# Altium PCB mchf_pro_mix.PcbDoc (part 1 of 2)
Units mil, origin at the board's own origin, x right, y up, seen from the top; angles counter-clockwise.
Board outline 3100.2 x 3132.7 mil, 2 copper layers (Top Layer, Bottom Layer); 178 components, 123 nets, 498 pads, 246 vias.
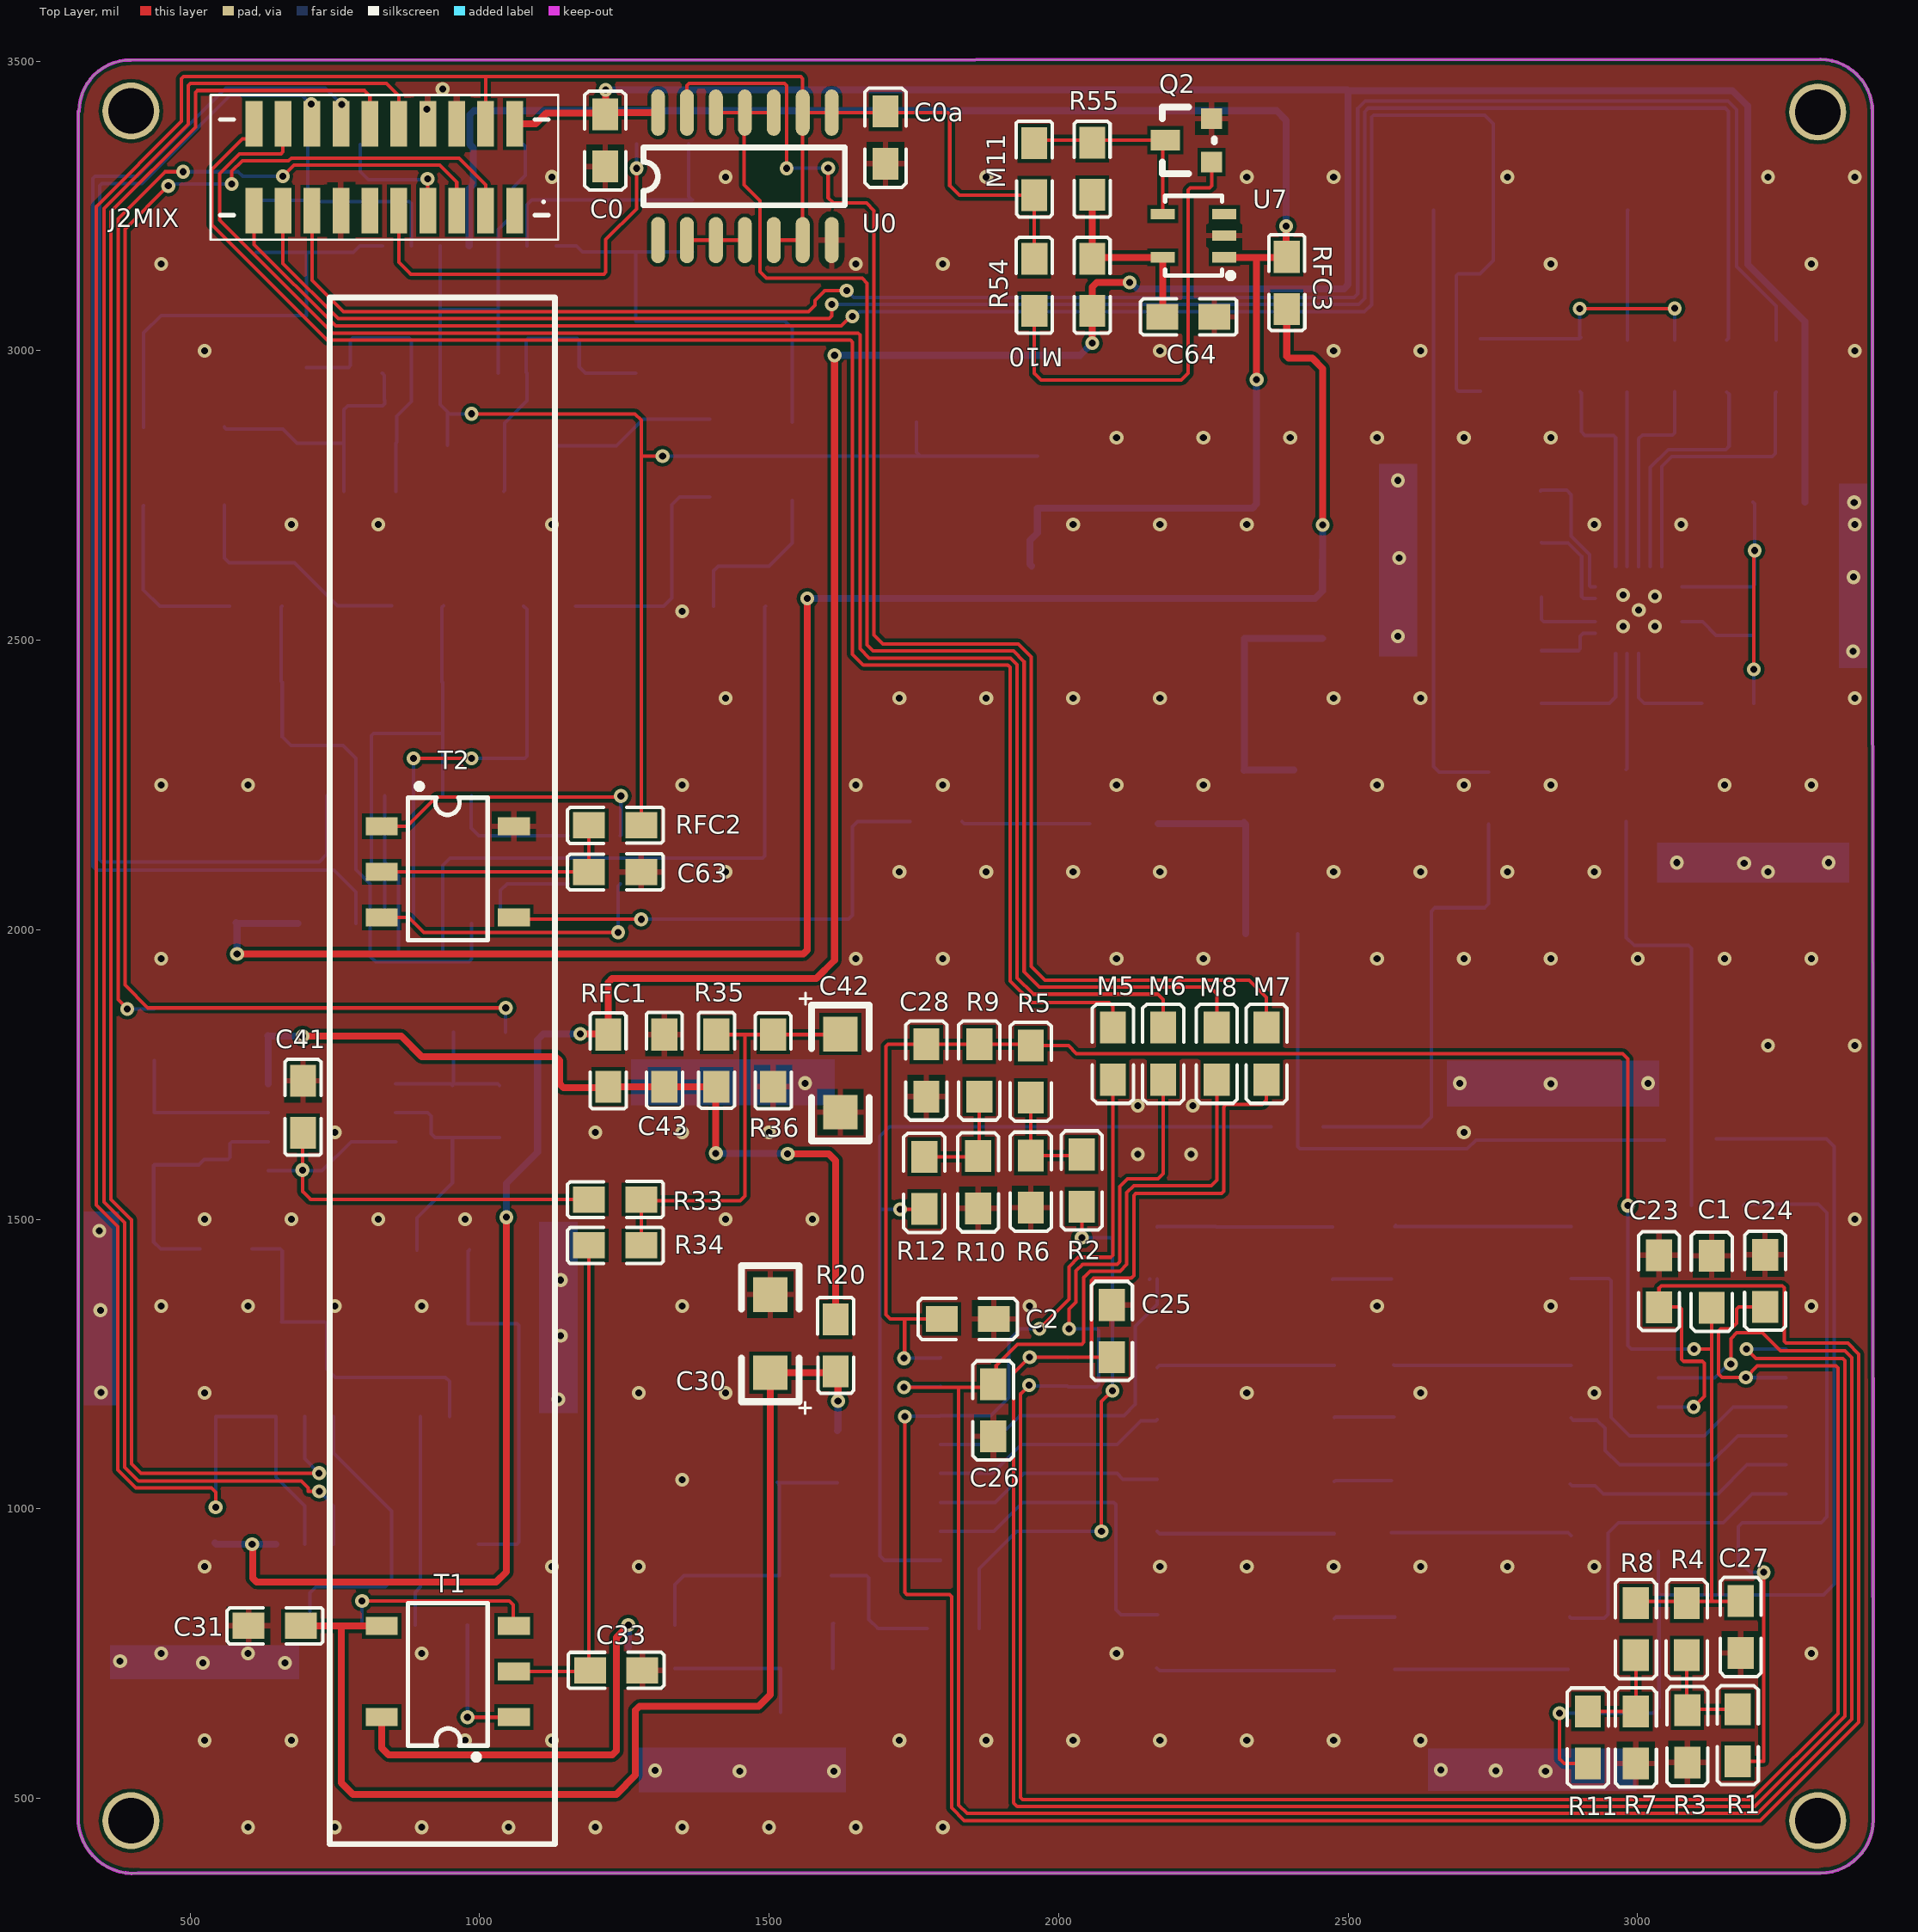
[diagram p0: Top Layer view]
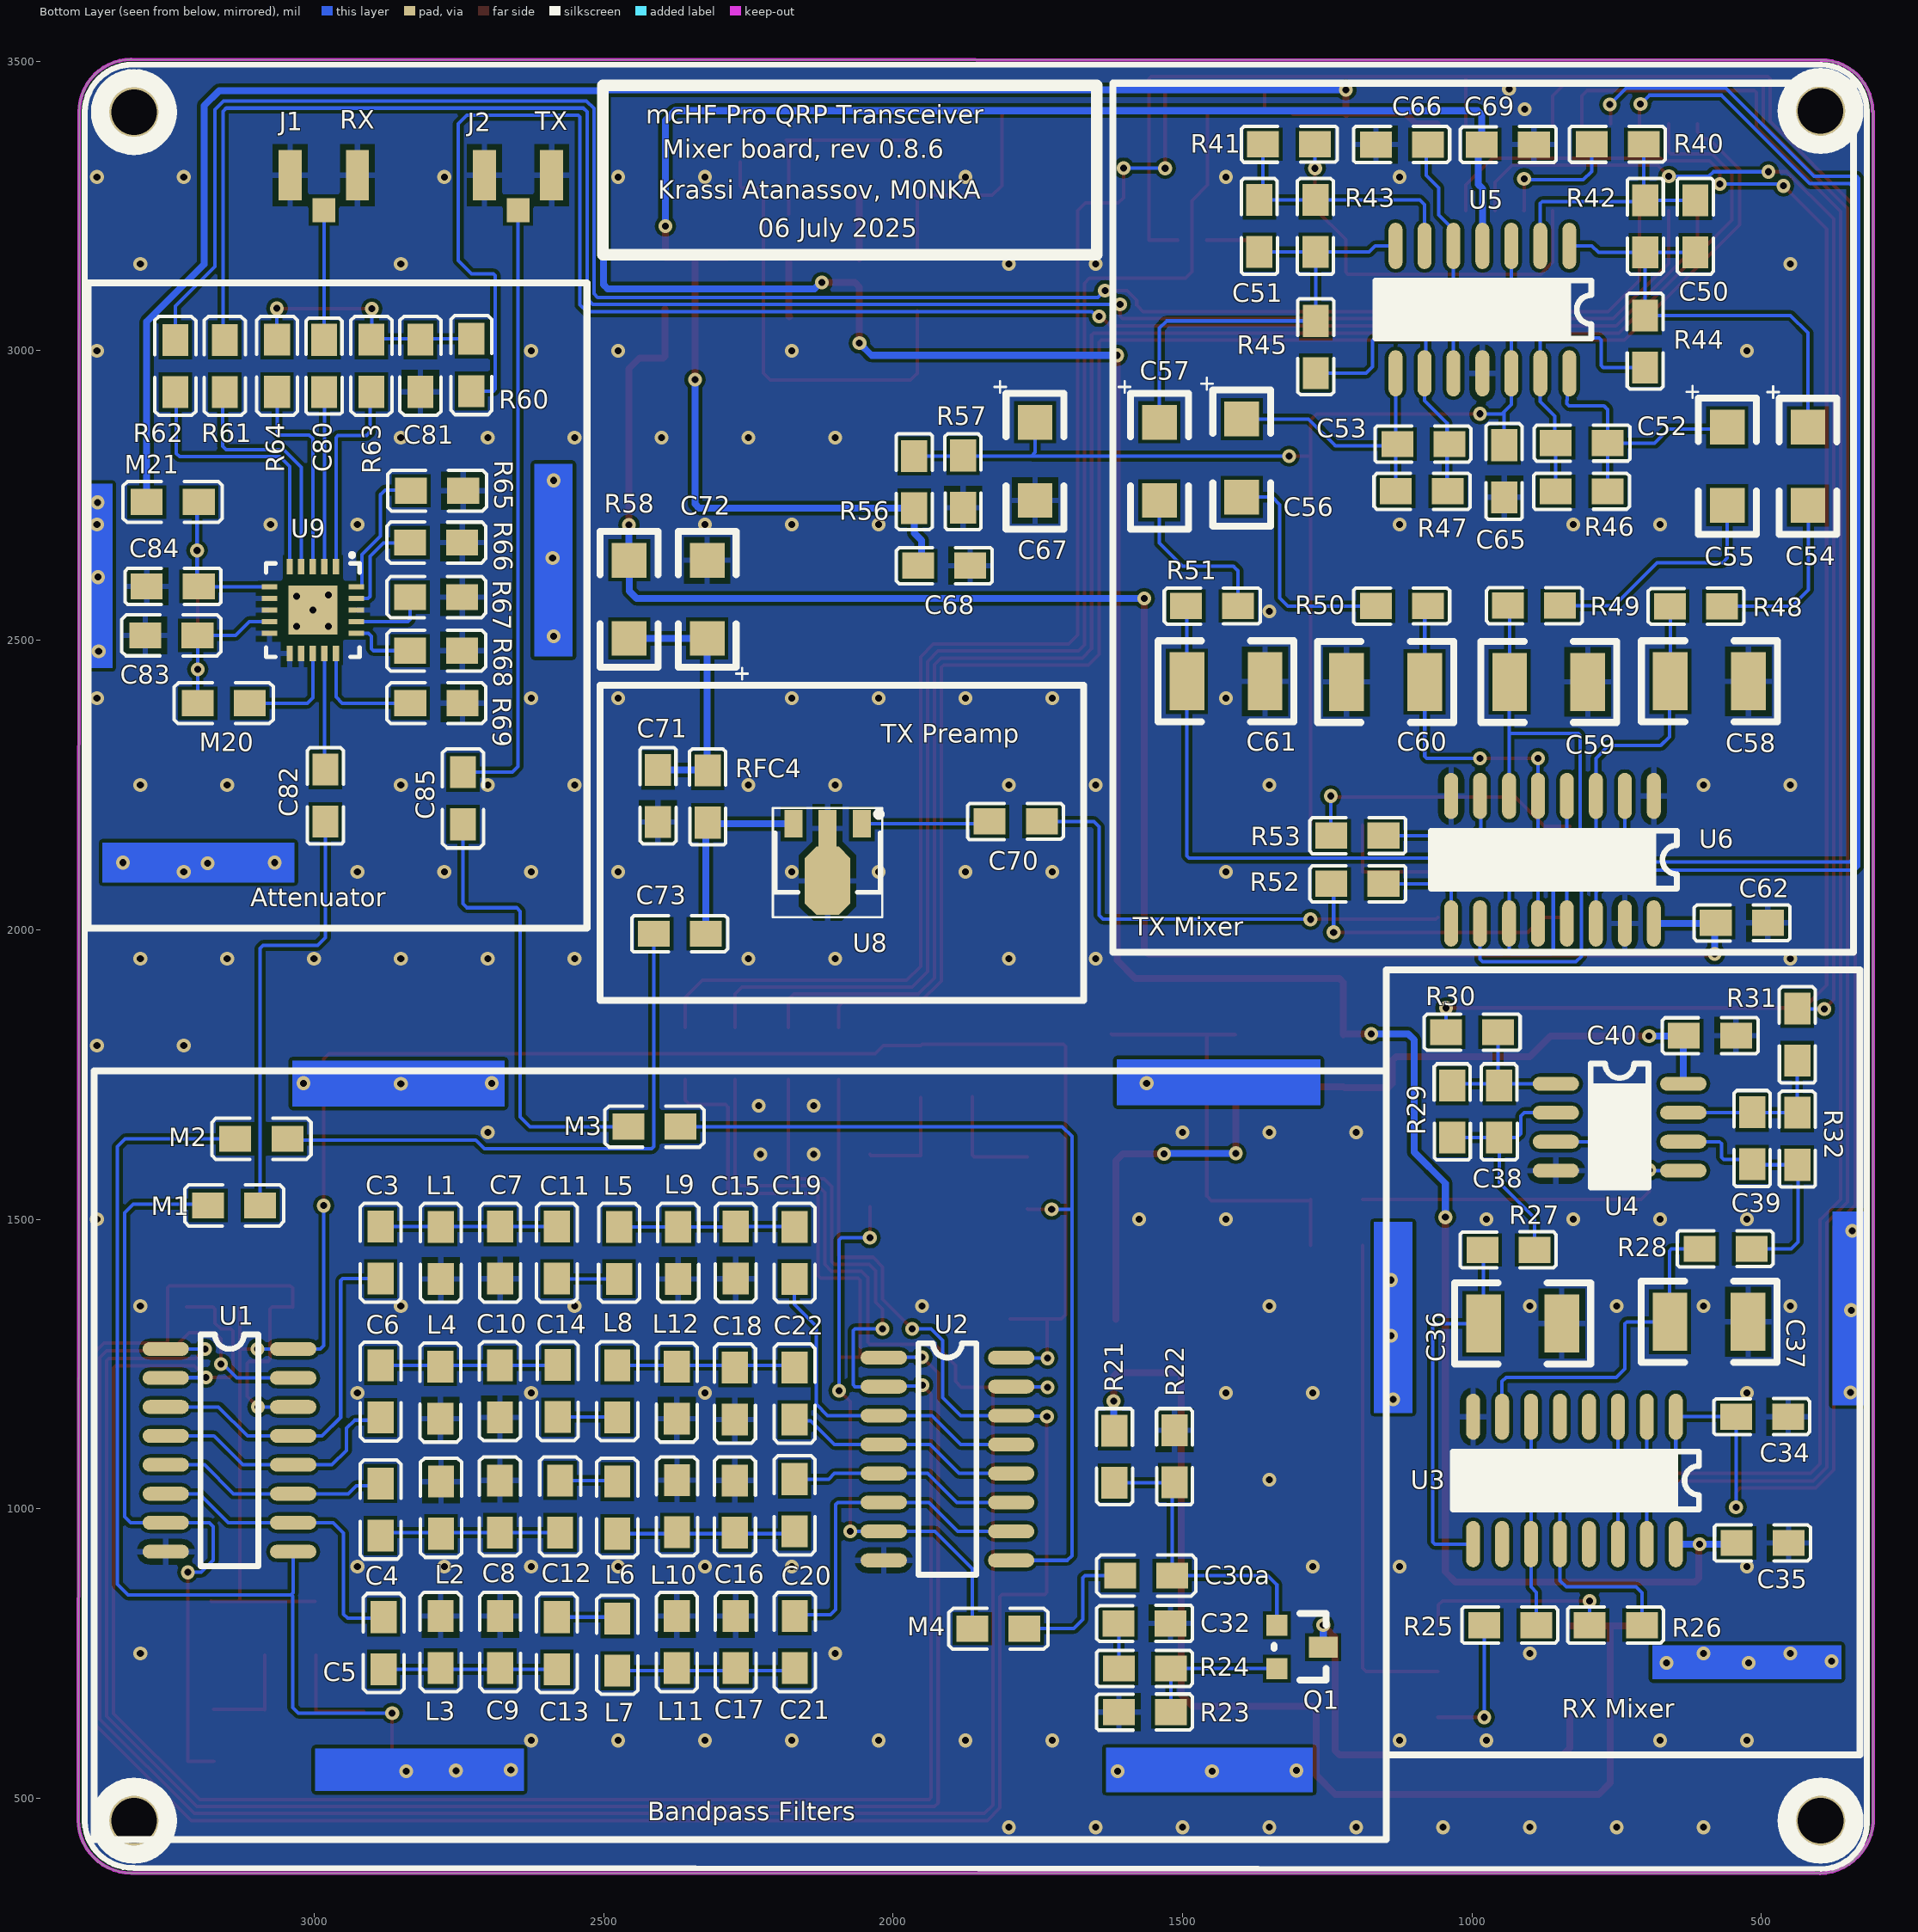
[diagram p1: Bottom Layer view, seen from below]

## Layer stack, top to bottom
Top Solder: solder mask 0.4, Solder Resist, Dk 3.5
Top Layer: signal copper 1.4
Dielectric1: core 12.6, FR-4, Dk 4.8
Bottom Layer: signal copper 1.4
Bottom Solder: solder mask 0.4, Solder Resist, Dk 3.5

## Board outline
306.88,457.96 ccw(c401.92,465.6) 409.56,370.56 3315.1,370.56 3315.55,371 3316,371 ccw(c3315.55,462.53) 3407.08,462.99 3407.05,468.78 3406.99,468.84 3406.73,1225.13 3406.48,1225.38 3405.99,2661.63 3405.74,3412 ccw(c3315.36,3412.62) 3315.98,3503 396.95,3502 397.47,3502 ccw(c396.98,3413.03) 308.01,3413.52 306.88,3413.48

## Design rules (kind name [scope] priority, off if disabled: settings)
Clearance [All] p1: gap=6 ignorepadtopadclearanceinfootprint=FALSE except(0: Arc-Hole Track-Hole SMDPad-Hole THPad-Hole Via-Hole Fill-Hole Poly-Hole Region-Hole Text-Hole)
ComponentClearance [All] p1: gap=6 collisioncheckmode=3 verticalgap=10 showdistances=FALSE
DiffPairsRouting [All] p1: maxlimit=24 minlimit=6 mostfreqgap=6 toplayer_minwidth=6 toplayer_maxwidth=6 toplayer_prefwidth=6 bottomlayer_minwidth=6 bottomlayer_maxwidth=6 bottomlayer_prefwidth=6 maxuncoupledlength=500
HoleSize [All] p1: absolutevalues=TRUE maxlimit=6000 minlimit=11.81 maxpercent=80.000 minpercent=20.000
HoleToHoleClearance [All] p1: gap=6 allowstackedmicrovias=TRUE
MinimumSolderMaskSliver MinimumSolderMaskSliver_CN1 [InComponent('CN1')] p1: minsoldermaskwidth=6
MinimumSolderMaskSliver [All] p2: minsoldermaskwidth=6
PolygonConnect PolygonConnect_2 [InComponent('J211')] p1: connectstyle=Direct reliefconductorwidth=100 reliefentries=4 polygonreliefangle="90 Angle" airgapwidth=10
PolygonConnect PolygonConnect_1 [IsVia] p2: connectstyle=Direct reliefconductorwidth=10 reliefentries=4 polygonreliefangle="90 Angle" airgapwidth=10
PolygonConnect [All] p3: connectstyle=Relief reliefconductorwidth=10 reliefentries=4 polygonreliefangle="90 Angle" airgapwidth=10
RoomDefinition "TX Mixer" [InComponentClass('TX Mixer')] p1: confinementstyle=ConfineIn formatcopy=TRUE lockcomponents=FALSE outline 315,1940 2540,1940 2540,3496 315,3496
RoomDefinition Attenuator [InComponentClass('Attenuator')] p2: confinementstyle=ConfineIn formatcopy=TRUE lockcomponents=FALSE outline 2547,1939 3402,1939 3402,3500 2547,3500
RoomDefinition "Bandpass filters" [InComponentClass('Bandpass filters')] p3: confinementstyle=ConfineIn formatcopy=TRUE lockcomponents=FALSE outline 3405,1929 1695,1929 1695,376 3405,376
RoomDefinition "RX Detector" [InComponentClass('RX Detector')] p4: confinementstyle=ConfineIn formatcopy=TRUE lockcomponents=FALSE outline 1683,1928 312,1928 312,375.78 1683,375.78
RoomDefinition "UI board Interface" [InComponentClass('UI board Interface')] p5: confinementstyle=ConfineIn formatcopy=TRUE lockcomponents=FALSE outline 312,3111 3401,3111 3401,3501 312,3501
RoutingVias [All] p1: holewidth=15 width=30 viastyle="Through Hole" minholewidth=28 minwidth=50 maxholewidth=28 maxwidth=50
SilkToSilkClearance [All] p1: silktosilkclearance=5
SilkToSolderMaskClearance SilkscreenOverComponentPads [IsPad] p1: minsilkscreentomaskgap=0 clearancetoexposedcopper=TRUE
SolderMaskExpansion SolderMaskExpansion_1 [IsVia] p1: expansion=-15 istentingtop=FALSE
SolderMaskExpansion [All] p2: expansion=6 istentingtop=FALSE
Width "Schematic Width Constraint" [InNet('VCC_5V_RF')] p1: maxlimit=12 minlimit=12 preferedwidth=12
Width "Schematic Width Constraint_16" [InNet('NetC73_2')] p2: maxlimit=12 minlimit=12 preferedwidth=12
Width "Schematic Width Constraint_15" [InNet('NetC71_1')] p3: maxlimit=12 minlimit=12 preferedwidth=12
Width "Schematic Width Constraint_14" [InNet('SC_A5V')] p4: maxlimit=12 minlimit=12 preferedwidth=12
Width "Schematic Width Constraint_13" [InNet('NetC64_2')] p5: maxlimit=12 minlimit=12 preferedwidth=12
Width "Schematic Width Constraint_12" [InNet('NetC30_1')] p6: maxlimit=12 minlimit=12 preferedwidth=12
Width "Schematic Width Constraint_11" [InNet('NetQ1_3')] p7: maxlimit=12 minlimit=12 preferedwidth=12
Width "Schematic Width Constraint_10" [InNet('RXD_A5V')] p8: maxlimit=12 minlimit=12 preferedwidth=12
Width "Schematic Width Constraint_6" [InNet('VCC_5V_TX')] p9: maxlimit=12 minlimit=12 preferedwidth=12
Width Width_BLGND [InNet('BLGND')] p10: maxlimit=12 minlimit=12 preferedwidth=12
Width Width_BLVDD [InNet('BLVDD')] p11: maxlimit=12 minlimit=12 preferedwidth=12
Width Width_VDD [InNet('VDD')] p12: maxlimit=12 minlimit=12 preferedwidth=12
Width Width_LCD_BL_A [InNet('LCD_BL_A')] p13: maxlimit=12 minlimit=12 preferedwidth=12
Width Width_LCD_BL_K [InNet('LCD_BL_K')] p14: maxlimit=12 minlimit=12 preferedwidth=12
Width Width_D1_1 [InNet('NetD1_1')] p15: maxlimit=12 minlimit=12 preferedwidth=12
Width [All] p16: maxlimit=6 minlimit=6 preferedwidth=6
23 further rules are at their usual default settings.

## Classes and differential pairs
component class Attenuator: C80 C81 C82 C83 C84 C85 J1 J2 M20 M21 R60 R61 R62 R63 R64 R65 R66 R67 R68 R69 U9
component class "Bandpass filters": C1 C2 C3 C4 C5 C6 C7 C8 C9 C10 C11 C12 C13 C14 C15 C16 C17 C18 C19 C20 C21 C22 C23 C24 C25 C26 C27 C28 L1 L2 L3 L4 L5 L6 L7 L8 L9 L10 L11 L12 M1 M2 M3 M4 M5 M6 M7 M8 R1 R2 R3 R4 R5 R6 R7 R8 R9 R10 R11 R12 U1 U2
component class "UI board Interface": C0 C0a J2MIX U0
component class "TX Mixer": C50 C51 C52 C53 C54 C55 C56 C57 C58 C59 C60 C61 C62 C63 C64 C65 C66 C67 C68 C69 C70 C71 C72 C73 M10 M11 Q2 R40 R41 R42 R43 R44 R45 R46 R47 R48 R49 R50 R51 R52 R53 R54 R55 R56 R57 R58 RFC2 RFC3 RFC4 T2 U5 U6 U7 U8
component class "RX Detector": C30 C30a C31 C32 C33 C34 C35 C36 C37 C38 C39 C40 C41 C42 C43 Q1 R20 R21 R22 R23 R24 R25 R26 R27 R28 R29 R30 R31 R32 R33 R34 R35 R36 RFC1 T1 U3 U4

## Components (designator, comment, footprint, x,y, rotation, side; value= is the part's Value field where it differs from the comment)
C0 "100nF" 0805 1216.78,3408.86 r270 top
C0a "100nF" 0805 1700.78,3413.86 r270 top
C1 "100nF" 0805 3128.22,1346.14 r90 top
C2 "100nF" 0805 1797.14,1327.78 r0 top
C3 "100nF" 0805 2885.22,1488.18 r270 bottom
C4 "100nF" 0805 2884.86,952.82 r90 bottom
C5 "100nF" 0805 2879.53,722.14 r90 bottom
C6 "100nF" 0805 2885.22,1248.39 r270 bottom
C7 "1.5nF" 0805 2678.78,1488.18 r270 bottom
C8 "820pF" 0805 2678.78,958.14 r90 bottom
C9 "390pF" 0805 2678.78,815.86 r270 bottom
C10 "180pF" 0805 2678.78,1157.14 r90 bottom
C11 "680pF" 0805 2580.78,1488.18 r270 bottom
C12 "390pF" 0805 2574.67,958.14 r90 bottom
C13 "180pF" 0805 2580.42,722.14 r90 bottom
C14 "82pF" 0805 2579.14,1249.18 r270 bottom
C15 "1.5nF" 0805 2271.78,1488.18 r270 bottom
C16 "820pF" 0805 2272.86,958.14 r90 bottom
C17 "390pF" 0805 2271.78,815.86 r270 bottom
C18 "180pF" 0805 2272.86,1153.14 r90 bottom
C19 "100nF" 0805 2169.86,1396.14 r90 bottom
C20 "100nF" 0805 2170.22,1052.18 r270 bottom
C21 "100nF" 0805 2169.86,815.86 r270 bottom
C22 "100nF" 0805 2169.86,1153.14 r90 bottom
C23 "100nF" 0805 3037.22,1347.14 r90 top
C24 "100nF" 0805 3220.39,1347.86 r90 top
C25 "100nF" 0805 2092.22,1261.14 r90 top
C26 "100nF" 0805 1886.78,1215.86 r270 top
C27 "100nF" 0805 3177.78,841.86 r270 top
C28 "100nF" 0805 1771.35,1802.86 r270 top
C30 "10uF" 1206_Elec_Cap 1502.22,1234.14 r90 top
C30a "100nF" 0805 1608.63,884.51 r180 bottom
C31 "100nF" 0805 691.86,798.22 r180 top
C32 "100nF" 0805 1519.91,802.28 r0 bottom
C33 "100nF" 0805 1190.14,720.78 r0 top
C34 "100nF" 0805 544.86,1158.78 r180 bottom
C35 "100nF" 0805 543.86,940.78 r180 bottom
C36 "22nF" CAP_B 980.39,1320.12 r180 bottom
C37 "22nF" CAP_B 658.39,1323.12 r180 bottom
C38 "390" 0805 952.78,1640.14 r90 bottom
C39 "390" 0805 515.78,1594.14 r90 bottom
C40 "100nF" 0805 543.14,1817.22 r0 bottom
C41 "100nF" 0805 695.22,1648.14 r90 top
C42 "10uF" 1206_Elec_Cap 1622.78,1820.86 r270 top
C43 "100nF" 0805 1318.78,1819.86 r270 top
C50 "100pF" 0805 614.52,3260.41 r270 bottom
C51 "100pF" 0805 1367.01,3169.45 r90 bottom
C52 "100pF" 0805 764.59,2840.71 r0 bottom
C53 "100pF" 0805 1129.93,2838.41 r180 bottom
C54 "10uF" 1206_Elec_Cap 419.93,2868.58 r270 bottom
C55 "10uF" 1206_Elec_Cap 559.22,2868.86 r270 bottom
C56 "10uF" 1206_Elec_Cap 1397.8,2882.95 r270 bottom
C57 "10uF" 1206_Elec_Cap 1539.99,2877.32 r270 bottom
C58 "22nF" CAP_B 657.78,2429.12 r180 bottom
C59 "22nF" CAP_B 935.39,2428.12 r180 bottom
C60 "22nF" CAP_B 1081.23,2427.88 r0 bottom
C61 "22nF" CAP_B 1492.78,2429.12 r180 bottom
C62 "100nF" 0805 488.14,2012.22 r0 bottom
C63 "100nF" 0805 1279.86,2100 r180 top
C64 "2.2uF" 0805 2269.8,3058.73 r180 top value=1礔
C65 "100nF" 0805 944.19,2746.01 r90 bottom
C66 "100nF" 0805 1166.86,3355.78 r180 bottom
C67 "10uF" 1206_Elec_Cap 1754.9,2877.32 r270 bottom
C68 "100nF" 0805 1866,2629 r0 bottom
C69 "100nF" 0805 892.14,3356.22 r0 bottom
C70 "100nF" 0805 1833.86,2186.78 r180 bottom
C71 "100nF" 0805 2406.22,2276.86 r270 bottom
C72 "10uF" 1206_Elec_Cap 2320.78,2502.28 r90 bottom
C73 "100nF" 0805 2413.86,1992.78 r180 bottom
C80 "100nF" 0805 2982.43,2927.88 r90 bottom
C81 "100pF" 0805 2816.41,3019.76 r270 bottom
C82 "100nF" 0805 2980.08,2185.9 r90 bottom
C83 "100pF" 0805 3200.38,2508.65 r0 bottom
C84 "100nF" 0805 3198.14,2593.22 r0 bottom
C85 "100nF" 0805 2742.86,2272.86 r270 bottom
J1 "RX" UFL 3041.14,3303 r180 bottom locked
J2 "TX" UFL 2705.66,3303 r180 bottom locked
J2MIX "1373866" YUANQI4MM 835.43,3316.54 r180 top locked
L1 "2.2uH" 0805 2780.78,1396.14 r90 bottom
L2 "1uH" 0805 2780.78,1047.86 r270 bottom
L3 "0.47uH" 0805 2781.58,815.86 r270 bottom
L4 "0.33uH" 0805 2781.58,1154.78 r90 bottom
L5 "4.7uH" 0805 2472.86,1396.14 r90 bottom
L6 "2.2uH" 0805 2476.39,1047.86 r270 bottom
L7 "1uH" 0805 2476.39,811.15 r270 bottom
L8 "0.68uH" 0805 2476.03,1157.14 r90 bottom
L9 "2.2uH" 0805 2370.86,1396.14 r90 bottom
L10 "1uH" 0805 2373.16,1050.18 r270 bottom
L11 "0.47uH" 0805 2373.52,815.86 r270 bottom
L12 "0.33uH" 0805 2373.16,1154.78 r90 bottom
M1 "0" 0805 3183.86,1523.78 r180 bottom
M2 "0" 0805 3136.86,1638.78 r180 bottom
M3 "0" 0805 2457.86,1659.78 r180 bottom
M4 "0" 0805 1772.14,793.22 r0 bottom
M5 "0" 0805 2093.6,1831.86 r270 top
M6 "0" 0805 2180.51,1831.86 r270 top
M7 "0" 0805 2358.84,1831.86 r270 top
M8 "0" 0805 2272.86,1831.86 r270 top
M10 "0" 0805 2058.22,3067.76 r90 top
M11 "0" 0805 1957.78,3359.1 r270 top
M20 "0" 0805 3110.09,2391.49 r0 bottom
M21 "0" 0805 3198.14,2738.91 r0 bottom
Q1 "BFR93A" SOT-23 1337.34,799.39 r270 bottom
Q2 "(DNI)IRLML6244TRPBF" SOT-23 2264.52,3325.2 r90 top
R1 "100K" 0805 3173.22,563.14 r90 top
R2 "100K" 0805 2040,1521 r90 top
R3 "4.7K" 0805 3086.22,561.14 r90 top
R4 "4.7K" 0805 3085.22,746.14 r90 top
R5 "4.7K" 0805 1951.78,1800.86 r270 top
R6 "4.7K" 0805 1951.78,1610.86 r270 top
R7 "4.7K" 0805 2997.22,559.14 r90 top
R8 "4.7K" 0805 2997.22,746.14 r90 top
R9 "4.7K" 0805 1862.78,1802.86 r270 top
R10 "4.7K" 0805 1860.78,1609.86 r270 top
R11 "100K" 0805 2913.78,650.86 r270 top
R12 "100K" 0805 1767.78,1608.86 r270 top
R20 "100" 0805 1614.78,1327.86 r270 top
R21 "4.7K" 0805 1617.78,1135.71 r270 bottom
R22 "1.5K" 0805 1513.41,1044.75 r90 bottom
R23 "10" 0805 1610.87,648.61 r180 bottom
R24 "10" 0805 1610.87,724.08 r180 bottom
R25 "100" 0805 979.86,798.78 r180 bottom
R26 "100" 0805 797.45,798.78 r180 bottom
R27 "100" 0805 982.86,1446.78 r180 bottom
R28 "100" 0805 607.86,1448.78 r180 bottom
R29 "2.2k" 0805 1033.78,1640.14 r90 bottom
R30 "100" 0805 954.14,1823.22 r0 bottom
R31 "100" 0805 437.78,1773.15 r90 bottom
R32 "2.2k" 0805 437.78,1593.14 r90 bottom
R33 "100" 0805 1279.86,1534.22 r180 top
R34 "100" 0805 1279.86,1455.22 r180 top
R35 "1K" 0805 1408.78,1819.86 r270 top
R36 "1K" 0805 1507.22,1728.14 r90 top
R40 "10k" 0805 794.26,3356.22 r180 bottom
R41 "10k" 0805 1270.14,3356.81 r0 bottom
R42 "10k" 0805 700.89,3260.41 r270 bottom
R43 "10k" 0805 1270.14,3169.45 r90 bottom
R44 "10k" 0805 701.22,3061.86 r270 bottom
R45 "10k" 0805 1270.14,3052.23 r270 bottom
R46 "10k" 0805 856.3,2756.89 r180 bottom
R47 "10k" 0805 1040.85,2757.41 r0 bottom
R48 "47" 0805 567.43,2558.78 r0 bottom
R49 "47" 0805 847,2560 r0 bottom
R50 "47" 0805 1166.86,2558.78 r180 bottom
R51 "47" 0805 1403.19,2559.36 r0 bottom
R52 "47" 0805 1152,2079.61 r0 bottom
R53 "47" 0805 1152,2162.87 r0 bottom
R54 "DNI(1k)" 0805 1958.36,3067.76 r90 top
R55 "DNI(100k)" 0805 2058.22,3268.14 r90 top
R56 "2.2k" 0805 1963.66,2819.1 r270 bottom
R57 "2.2k" 0805 1878.78,2728.14 r90 bottom
R58 "27" 1206 2455.91,2638.99 r270 bottom
R60 "100" 0805 2728.49,3021.19 r270 bottom
R61 "100" 0805 3153.93,2927.72 r90 bottom
R62 "100" 0805 3239.36,2927.72 r90 bottom
R63 "10k" 0805 2901.08,3019.76 r270 bottom
R64 "10k" 0805 3064.04,3019.76 r270 bottom
R65 "10k" 0805 2833.29,2757.88 r180 bottom
R66 "10k" 0805 2834.9,2668.38 r180 bottom
R67 "10k" 0805 2834.9,2574.17 r180 bottom
R68 "10k" 0805 2834.9,2481.72 r180 bottom
R69 "10k" 0805 2742.86,2391.49 r0 bottom
RFC1 "47uH" 0805 1222.22,1728.14 r90 top
RFC2 "47uH" 0805 1279.86,2180.75 r180 top
RFC3 "47uH" 0805 2393.78,3162.86 r270 top
RFC4 "47uH" 0805 2319.78,2184.14 r90 bottom
T1 "CX2074NL" SOP5_NEW1 945,719 r90 top locked
T2 "CX2074NL" SOP5_NEW1 945,2100 r270 top locked
U0 "74HCT02" SO-14 1308,3191 r90 top
U1 "SN74CBT3253C" SO-16 3256,1276 r180 bottom locked
U2 "SN74CBT3253C" SO-16 2016,1261 r180 bottom locked
U3 "SN74CBT3253C" SO-16-Pro 648,1159 r270 bottom
U4 "OPA2350UA" SO-8 855,1734 r180 bottom
U5 "TLV2464CD" SO-14-Pro 832,3181 r270 bottom
U6 "SN74CBT3253C" SO-16-Pro 686,2231 r270 bottom
U7 "AP22811A" SOT25-5 2233,3198.62 r180 top
U8 "HMC482ST89E" SOT89L_new 2113,2116 r270 bottom
U9 "PE4312" QFN20_4X4 3002,2552 r270 bottom

## Footprints (in the part's own frame and the unit in brackets; to place one, negate y for a bottom-side part, rotate by r counter-clockwise, add the part's x,y. Pads: shape width x height; smd on the part's side, far side on the other; paste and mask are expansions set on the pad)
0805 [mil]
  rect 55x45 smd: 1(0.86,0.22) 2(90.86,0.22)
  silkscreen extent -40,-35 132,36
1206 [mil]
  rect 60x60 smd: 1(0.86,0.22) 2(135.86,0.22)
  silkscreen extent -49,-50 186,50
1206_Elec_Cap [mil]
  rect 60x60 smd: 1(0.86,0.22) 2(135.86,0.22)
  silkscreen extent -70,-70 186,50
CAP_B [mil]
  rect 60x100 smd: 1(0.39,-0.12) 2(135.39,-0.12)
  silkscreen extent -50,-70 185,70
QFN20_4X4 [mm] "QFN 20 Pins, Pitch 0.5mm, 4mmx4mm"
  rect 2.159x2.159 smd: 0(0,0)
  rect 0.69x0.28 smd: 1(-1.905,1.016) 2(-1.905,0.508) 3(-1.905,0) 4(-1.905,-0.508) 5(-1.905,-1.016) 11(1.905,-1.016) 12(1.905,-0.508) 13(1.905,0) 14(1.905,0.508) 15(1.905,1.016)
  rect 0.229x0.69 smd: 6(-1.016,-1.905) 7(-0.508,-1.905) 8(0,-1.905) 9(0.508,-1.905) 10(1.016,-1.905) 16(1.016,1.905) 17(0.508,1.905) 18(0,1.905) 19(-0.508,1.905) 20(-1.016,1.905)
  silkscreen extent -2.46,-2.05 2.05,2.05, body extent -2.05,-2.05 2.05,2.05, height 1
SO-8 [mil]
  oval 80x24 smd: 1(0,0) 2(0,-50) 3(0,-100) 4(0,-150) 5(220,-150) 6(220,-100) 7(220,-50) 8(220,0)
  silkscreen extent 60,-179 160,35
SO-14 [mil]
  oval 80x24 smd: 1(0,0) 2(0,-50) 3(0,-100) 4(0,-150) 5(0,-200) 6(0,-250) 7(0,-300) 8(220,-300) 9(220,-250) 10(220,-200) 11(220,-150) 12(220,-100) 13(220,-50) 14(220,0)
  silkscreen extent 60,-323 160,25
SO-14-Pro [mil]
  oval 80x24 smd: 1(0,0) 2(0,-50) 3(0,-100) 4(0,-150) 5(0,-200) 6(0,-250) 7(0,-300) 8(220,-300) 9(220,-250) 10(220,-200) 11(220,-150) 12(220,-100) 13(220,-50) 14(220,0)
  silkscreen extent 59,-335 161,38
SO-16 [mil]
  oval 80x24 smd: 1(0,0) 2(0,-50) 3(0,-100) 4(0,-150) 5(0,-200) 6(0,-250) 7(0,-300) 8(0,-350) 9(220,-350) 10(220,-300) 11(220,-250) 12(220,-200) 13(220,-150) 14(220,-100) 15(220,-50) 16(220,0)
  silkscreen extent 60,-375 160,25
SO-16-Pro [mil]
  oval 80x24 smd: 1(0,0) 2(0,-50) 3(0,-100) 4(0,-150) 5(0,-200) 6(0,-250) 7(0,-300) 8(0,-350) 9(220,-350) 10(220,-300) 11(220,-250) 12(220,-200) 13(220,-150) 14(220,-100) 15(220,-50) 16(220,0)
  silkscreen extent 59,-385 160,40
SOP5_NEW1 [mm] "Small Outline; 6 Leads (1 Absent); Body Width 6.9 mm; Pitch 2 mm"
  rect 0.8x1.4 smd: 1(-2,-2.9) 2(0,-2.9) 3(2,-2.9) 4(2,2.9) 6(-2,2.9)
  silkscreen extent -3.87,-1.75 3,1.75
SOT25-5 [mm] "5 lead package"
  rect 1.05x0.457 smd: 1(-1.35,0.95) 2(-1.35,0) 3(-1.35,-0.95) 4(1.35,-0.95) 5(1.35,0.95)
  silkscreen extent -1.75,-1.75 1.25,1.87
SOT89L_new [mm] "SOT89, 3-Leads, Body 4.5x2.4 mm, Pitch 1.5mm, Lead Span 4.1mm, IPC High Density"
  rect 1.2x0.8 smd: 1(-1.7,1.5) 3(-1.7,-1.5)
  rect 1.6x0.8 smd: 2(-1.5,0)
  oct 3x2 smd: 2(0.8,0)
  silkscreen extent -2.4,-2.4 2.4,2.4
SOT-23 [mil]
  rect 36x36 smd: 1(0.39,0.34) 2(75.39,0.34)
  rect 36x50 smd: 3(38.39,80.34)
  silkscreen extent -20,-5 95,85
UFL [mm]
  rect 1.016x2.2 smd: 1(0,0) 3(2.95,0)
  rect 1x1.05 smd: 2(1.475,-1.53)
YUANQI4MM [mm] "Board To Board 1.27mm pitch 20pin 4mm stack"
  rect 0.74x2 smd: A1(-5.715,1.905) A2(-4.445,1.905) A3(-3.175,1.905) A4(-1.905,1.905) A5(-0.635,1.905) A6(0.635,1.905) A7(1.905,1.905) A8(3.175,1.905) A9(4.445,1.905) A10(5.715,1.905) A11(-5.715,-1.905) A12(-4.445,-1.905) A13(-3.175,-1.905) A14(-1.905,-1.905) A15(-0.635,-1.905) A16(0.635,-1.905) A17(1.905,-1.905) A18(3.175,-1.905) A19(4.445,-1.905) A20(5.715,-1.905)
  silkscreen extent -7.62,-3.18 7.62,3.18

## Part data
C0 C0a C1 C2 C3 C4 C5 C6 C7 C8 C9 C10 C11 C12 C13 C14 C15 C16 C17 C18 C19 C20 C21 C22 C23 C24 C25 C26 C27 C28 C30a C31 C32 C33 C34 C35 C38 C39 C40 C41 C43 C50 C51 C52 C53 C62 C63 C65 C66 C68 C69 C70 C71 C73 C80 C81 C82 C83 C84 C85: library part CAP, "Capacitor"
  C0 C0a C1 C2 C3 C4 C5 C6 C19 C20 C21 C22 C23 C24 C25 C26 C27 C28: Price=0.068, QT Order=QCC-00154
  C7 C15: Notes=COG/NPO, Price=0.124, QT Order=QCC-00082
  C8 C16: Notes=COG/NPO, Price=0.074, QT Order=QCC-00147
  C9 C12 C17: Notes=COG/NPO, Price=0.078, QT Order=QCC-00125
  C10 C13 C18: Notes=COG/NPO, Price=0.058, QT Order=QCC-00084
  C11: Notes=COG/NPO, Price=0.074
  C14: Notes=COG/NPO, Price=0.074, QT Order=QCC-00069
  C30a C31 C32 C33 C34 C35 C40 C41 C43 C62 C63 C65 C66 C68 C69 C70 C71 C73 C80 C81 C82 C83 C84 C85: Order="FN 252-2090", Price=0.068, QT Order=QCC-00154
  C38 C39: Order="FN 233-2701", Price=0.078, QT Order=QCC-00125
  C50 C51 C52 C53: Order="FN 233-2692", Price=0.056, QT Order=QCC-00070
C30 C42 C54 C55 C56 C57 C67 C72: library part CAP-POL, "Electrolitic capacitor", Order="FN 233-3009", Price=0.204, QT Order=QCC-00166
C36 C37 C58 C59 C60 C61: library part CAP, "Capacitor", Voltage=100V/NPO, Order="FN 221-1120", Price=0.84
C64: library part "CAP SMD 0603  X5R 1礔 25V 10%", "0603  X5R 1礔", Rated voltage=25V, Temperature Max=+125癈, Temperature Min=-55癈, Tolerance=10%, Order code Farnell=1288202RL, Technology=X5R
J1 J2: library part UFL
J2MIX: library part YQ_20p, "SMD male connector, nominal current: 2.2 A, Test voltage: 840 VAC, number of positions: 20, pitch: 1.27 mm, color: black, contact surface: Gold, type of contact: Male connector, mounting: SMD soldering", Manufacturer_Name="Phoenix Contact", Mouser Part Number=651-1373866, Datasheet Link=http://www.phoenixcontact.com/gb/produkte/1373866, Geometry.Height=6.75mm, Manufacturer_Part_Number=1373866, Mouser Price/Stock=https://www.mouser.co.uk/ProductDetail/Phoenix-Contact/1373866?qs=2SLPxufLcgAs0enIXKjUUw%3D%3D
L1 L2 L3 L4 L5 L6 L7 L8 L9 L10 L11 L12: library part BPF_IND, "INDUCTOR SMD", Price=0.166
M1 M2 M3 M4 M5 M6 M7 M8 M10 M11 M20 M21 R1 R2 R3 R4 R5 R6 R7 R8 R9 R10 R11 R12 R20 R21 R22 R23 R24 R25 R26 R27 R28 R29 R30 R31 R32 R33 R34 R35 R36 R40 R41 R42 R43 R44 R45 R46 R47 R48 R49 R50 R51 R52 R53 R54 R55 R56 R57 R58 R60 R61 R62 R63 R64 R65 R66 R67 R68 R69: library part RES, "Resistor"
  M1 M2 M3 M4 M5 M6 M7 M8: Price=0.009, QT Order=QCR-00268
  M10 M11 M20 M21 R54: Order="FN 933-3681", Price=0.009, QT Order=QCR-00268
  R1 R2 R11 R12: Price=0.021, QT Order=QCR-00373
  R3 R4 R5 R6 R7 R8 R9 R10: Price=0.024, QT Order=QCR-00341
  R20 R25 R26 R27 R28 R30 R31 R33 R34 R60 R61 R62 R63 R64 R65 R66 R67 R68 R69: Order="FN 933-2375", Price=0.027, QT Order=QCR-00301
  R21: Order="FN 200-8383", Price=0.024, QT Order=QCR-00341
  R22: Order="FN 165-2940", Price=0.036, QT Order=QCR-00329
  R23 R24: Order="FN 933-2421", Price=0.013, QT Order=QCR-00279
  R29 R32 R56 R57: Order="FN 188-7289", Price=0.046, QT Order=QCR-00333
  R35 R36 R55: Order="FN 157-6459", Price=0.061, QT Order=QCR-00579
  R40 R41 R42 R43 R44 R45 R46 R47: Order="FN 146-9856", Price=0.021, QT Order=QCR-00349
  R48 R49 R50 R51 R52 R53: Order="FN 173-8942", Price=0.052, QT Order=QCR-00293
  R58: Order="FN 205-7802", Price=0.017, QT Order=QCR-00427
Q1: "TRANSISTOR, RF, NPN, 12V, 0.035MA,SOT-23", Order="FN 108-1300", Price=0.161
Q2: library part MOSFET-N, "N-Channel MOSFET", Order="FN 186-4517", Price=0.231, QT Order=QCT-00022, QT Price=0.28
RFC1 RFC2 RFC3 RFC4: library part TDK-NLV25T, "INDUCTOR, SIGNAL LINE, 4.7UH, 1005", Order="FN 166-9895", Price=0.166
T1 T2: "Wideband RF Transformer 1:4", Order="DK 553-1655-ND", Price=2.01
U0: "Quad 2-input NOR gate", Price=0.38, QT Order=QCI-01079
U1 U2 U3 U6: "Dual 4:1 Demux/Analog Switch", Price=0.69
  U3 U6: Order="FN 175-0447"
U4: "High Speed, Single Supply OpAmp", Order="FN 110-1542", Price=4.67
U5: "Low Power, Rail-To-Rail OpAmp", Order="FN 845-5171", Price=1.47
U7: library part AP22811, "High-side switch", Order="FN 274-8550"
U8: library part HMS482ST89E, "MMIC AMPLIFIER", Notes="What was the Farnell replacement part for this ? Or source from Ali, as it is EOL", Order="FN 245-6527", Price=2.82
U9: "4Ghz Attenuator"

## Free pads (board coordinates)
  round 98.43 hole 78.74: 1(397.83,461.42) 1(397.85,3414.05) 1(3311.02,461.42) 1(3311.02,3412.09)

## Via types
v1: diameter 24, hole 12, Top Layer to Bottom Layer, 246 vias

## Nets (pads, with @x,y where several pads share a name; then routed paths per layer and width w, separated by ;. In a path a pad name is that pad's centre, name@x,y a point inside that pad or via, vN(x,y) a via of type N, cw(c..) or ccw(c..) an arc to the next point about the centre after c; other vN are vias at no path point)
ANT_RX_ON: U0.2 U0.3 U0.4 | length 100
  Top Layer w6: U0.2@1358,3191 U0.3@1408,3191 U0.4@1458,3191
ANT_TX_ON: U0.1
ATT_CLK: J2MIX.A9 R61.2 | length 3376.8
  Top Layer w6: J2MIX.A9@660.43,3241.54 660.43,3150.57 755.73,3055.27 1603.67,3055.27 1608,3059.6 v1(1608,3080)
  Bottom Layer w6: v1(1608,3080) 2518.46,3080 2528.55,3090.1 2528.55,3412.55 2534.91,3418.91 3151.5,3418.91 3157,3413.41 3157,3021.43 R61.2@3154.15,3018.58
ATT_DATA: J2MIX.A10 R60.2 | length 3153.6
  Top Layer w6: J2MIX.A10@610.43,3241.54 610.43,3183.36 751.18,3042.61 1624.61,3042.61 1641,3059 v1(1644,3059)
  Bottom Layer w6: v1(1644,3059) 1645.79,3060.79 1650.18,3060.79 1656.51,3067.12 2528.12,3067.12 2540.55,3079.55 2540.55,3403.39 2544.07,3406.91 2736.09,3406.91 2751,3392 2751,3155.97 2728.03,3133 2690.3,3133 2686.78,3129.49 2686.78,2933.85 2690.3,2930.34 R60.2@2728.27,2930.34
ATT_LE: J2MIX.A8 R62.2 | length 3388.7
  Top Layer w6: J2MIX.A8@710.43,3241.54 710.43,3121.57 764.73,3067.27 1568,3067.27 1579,3078.27 1579,3087 1595.95,3103.95 v1(1633.87,3103.95)
  Bottom Layer w6: v1(1633.87,3103.95) 1634.43,3103.95 1646.38,3092 2510.04,3092 2516.55,3098.51 2516.55,3418.55 2529.38,3431.38 3156,3431.38 3171,3416.38 3171,3145.55 3239.58,3076.97 R62.2@3239.58,3018.58
B1: M1.1 R1.1 U1.7 | length 1317.8
  Top Layer w6: R1.1@3173,564 3217.75,564 3218.01,564.26 v1(3218.01,890.28)
  Bottom Layer w6: M1.1@3183,1524 3185,1526 3312,1526 3327,1511 3327,986 3317,976 U1.7@3256,976 3181,976 3174,969 3174,911 3194.72,890.28 v1(3218.01,890.28)
B2: M2.1 R11.2 U1.9 | length 1851.5
  Top Layer w6: v1(2865,647) 2865,568 2873,560 R11.2@2914,560
  Bottom Layer w6: v1(2865,647) 3027,647 3037,657 3037,848.81 3039.51,851.32 ; U1.9@3036,926 3036,854.84 3039.51,851.32 ; M2.1@3136,1639 3326,1639 3339.44,1625.56 3339.44,869.44 3321.32,851.32 3039.51,851.32
B3: M4.2 R2.1 U2.7 | length 961.1
  Top Layer w6: R2.1@2039.78,1521.86 2040,1521.63 v1(2040,1468) ; v1(2074,961) 2074,1185 v1(2093,1204)
  Bottom Layer w6: M4.2@1863,793 1863,896.69 1927.31,961 U2.7@2016,961 v1(2074,961) ; v1(2040,1468) 2089.49,1468 2093,1464.49 v1(2093,1204)
B4: M3.2 R12.2 U2.9 | length 1592.8
  Top Layer w6: v1(1726,1517) 1767,1517 R12.2@1768,1518
  Bottom Layer w6: v1(1726,1517) 1691,1517 ; U2.9@1796,911 1699,911 1691,919 1691,1517 ; M3.2@2367,1660 1707.89,1660 1691,1643.11 1691,1517
BAND0: J2MIX.A20 M5.1 | length 2993.9
  Top Layer w6: J2MIX.A20@610.43,3391.54 610.43,3377.65 598.87,3366.08 590.38,3366.08 537.57,3313.27 537.57,3217.43 736.78,3018.22 1640.5,3018.22 1644.01,3014.71 1644.01,2475.99 1662.72,2457.28 1912.21,2457.28 1916.41,2453.07 1916.41,1911.72 1954.04,1874.09 2087.23,1874.09 2093.82,1867.5 M5.1@2093.82,1831
BAND1: J2MIX.A19 M6.1 | length 3123.6
  Top Layer w6: J2MIX.A19@660.43,3391.54 660.43,3343.51 656.92,3340 585.03,3340 551,3305.97 551,3225.82 746.25,3030.57 1653.49,3030.57 1657,3027.06 1657,2485 1672.72,2469.28 1917.18,2469.28 1928.41,2458.04 1928.41,1916.69 1956.32,1888.78 2171.22,1888.78 2180.73,1879.27 M6.1@2180.73,1831
BND0: C23.1 M5.2 U1.14 U2.14 | length 4698.9
  Top Layer w6: v1(1734.25,1159.22) 1734.25,855.51 1737.76,852 1811.75,852 1815.26,848.49 1815.26,483.43 1836.97,461.73 3212.1,461.73 3382.11,631.74 3382.11,1266.89 3363,1286 3256.63,1286 3253.11,1289.51 3253.11,1381.7 3249.6,1385.21 3041.06,1385.21 3037,1381.15 C23.1@3037,1348.47 ; v1(1967,1311) 2017.84,1361.84 2017.84,1417.84 2034.41,1434.41 2090.31,1434.41 2093.82,1437.92 M5.2@2093.82,1741 ; C23.1@3037,1348 3037.47,1348.47 3072.34,1348.47 3075.86,1344.96 3075.86,1258.25 3079.37,1254.73 3111.81,1254.73 3115.32,1251.22 3115.32,1194.33 v1(3096.95,1175.96)
  Bottom Layer w6: v1(1734.25,1159.22) 1735.14,1160.11 1795.11,1160.11 U2.14@1796,1161 1883,1161 1914,1192 1914,1291 1934,1311 v1(1967,1311) ; U1.14@3036,1176 v1(3096.95,1175.96)
BND1: C24.1 M6.2 U1.2 U2.2 | length 4095.5
  Top Layer w6: v1(1949,1213.28) 1934,1198.28 1934,501.25 1937.51,497.73 3197.19,497.73 3346.11,646.65 3346.11,1243.29 3342.59,1246.8 3206.8,1246.8 v1(3187,1227) 3146,1227 3140,1233 3140,1306.99 3143.51,1310.5 3160.82,1310.5 3171,1320.68 3171,1344.94 3174.51,1348.46 3219.91,1348.46 C24.1@3220.17,1348.71 ; v1(2018,1311) 2018,1345.03 2029.84,1356.87 2029.84,1410.84 2041.41,1422.41 2101.28,1422.41 2105.82,1426.95 2105.82,1556.82 2119,1570 2172,1570 2180.73,1578.73 M6.2@2180.73,1741
  Bottom Layer w6: v1(1949,1213.28) 1949.21,1213.28 1950.35,1212.14 2014.86,1212.14 2016.55,1210.45 2065.43,1210.45 2068.94,1213.96 2068.94,1307.49 2065.43,1311 v1(2018,1311) ; v1(3187,1227) 3187.5,1226.5 3255.5,1226.5 U1.2@3256,1226
GND: C0.2 C0a.2 C1.2 C2.2 C7.2 C8.2 C9.1 C10.1 C15.2 C16.2 C17.1 C18.1 C23.2 C24.2 C25.2 C26.2 C27.2 C28.2 C30.2 C31.2 C32.1 C33.2 C34.2 C35.2 C36.2 C37.2 C40.1 C41.2 C42.2 C43.1 C58.2 C59.2 C60.2 C61.2 C62.1 C63.1 C64.1 C65.1 C66.1 C67.2 C68.1 C69.1 C71.2 C72.2 C81.2 C83.2 C84.2 J1.1 J1.3 J2.1 J2.3 J2MIX.A7 J2MIX.A13 J2MIX.A14 L1.1 L2.1 L3.1 L4.1 L9.1 L10.1 L11.1 L12.1 Q2.2 R3.1 R6.2 R7.1 R10.2 R22.2 R23.1 R36.1 R57.1 R65.2 R66.2 R67.2 R68.2 R69.1 T2.6 U0.7 U1.8 U2.8 U3.8 U4.4 U5.11 U6.1 U6.8 U6.15 U7.2 U8.2 U9.0 U9.7 U9.8 U9.10 U9.11 U9.12 U9.18
  other v1: 600,450 750,450 900,450 1050,450 1200,450 1350,450 1500,450 1650,450 1800,450 1449,547 1612,547 2841,547 1303,548 2754.95,547.88 2660,549 525,600 675,600 975,600 1125,600 1725,600 1875,600 2025,600 2175,600 2325,600 2475,600 2625,600 522,734 664,734 379,737 450,750 600,750 900,750 2100,750 3300,750 525,900 1125,900 1275,900 2175,900 2325,900 2475,900 2625,900 2775,900 2925,900 1350,1050 1136,1189 525,1200 1275,1200 1425,1200 2325,1200 2625,1200 2925,1200 346,1201 1140,1299 345,1343 450,1350 600,1350 750,1350 900,1350 1350,1350 1950,1350 2550,1350 2850,1350 3300,1350 1140,1395 343,1480 525,1500 675,1500 825,1500 975,1500 1425,1500 1575,1500 3375,1500 2137,1612 2229,1612 750,1650 1200,1650 1350,1650 1500,1650 2700,1650 2137,1696 2232,1696 2850,1734 1562,1735 2693,1735 3018,1735 3225,1800 3375,1800 450,1950 1650,1950 1800,1950 2100,1950 2250,1950 2550,1950 2700,1950 2850,1950 3000,1950 3150,1950 3300,1950 1425,2100 1725,2100 1875,2100 2025,2100 2175,2100 2475,2100 2625,2100 2775,2100 2925,2100 3225,2100 3184,2115 3068,2116 3330,2116 450,2250 600,2250 1350,2250 1650,2250 1800,2250 2100,2250 2250,2250 2550,2250 2700,2250 2850,2250 3150,2250 3300,2250 1425,2400 1725,2400 1875,2400 2025,2400 2175,2400 2475,2400 2625,2400 3375,2400 3372,2481 2586,2507 2975,2524 3030,2524 1350,2550 3002,2552 3030,2576 2975,2578 3373,2609 2588,2642 675,2700 825,2700 1125,2700 2025,2700 2175,2700 2325,2700 2925,2700 3075,2700 3375,2700 3374,2738 2586,2776 2100,2850 2250,2850 2400,2850 2550,2850 2700,2850 2850,2850 525,3000 2175,3000 2475,3000 2625,3000 3375,3000 450,3150 1650,3150 1800,3150 2850,3150 3300,3150 1125,3300 1425,3300 1875,3300 2325,3300 2475,3300 2775,3300 3225,3300 3375,3300 909,3417 936,3452
NetC3_1: C3.1 C7.1 C11.1 L1.2 | length 307.3
  Bottom Layer w6: C11.1@2582.56,1489.33 C11.1@2580.56,1487.33 C7.1@2678.56,1487.33 C3.1@2885,1487.33
NetC3_2: C3.2 U1.3 U1.13 | length 642.2
  Bottom Layer w6: C3.2@2885,1397.33 2950.49,1397.33 2954,1393.81 2954,1158 2986,1126 U1.13@3036,1126 3115,1126 3165,1176 U1.3@3256,1176
NetC4_1: C4.1 C8.1 C12.1 L2.2 | length 312.4
  Bottom Layer w6: C12.1@2574.9,959 C8.1@2679,959 2879.76,959 C4.1@2885.08,953.67
NetC4_2: C4.2 U1.5 U1.11 | length 399.8
  Bottom Layer w6: C4.2@2884,1043 2887,1040 2927,1040 2941,1026 U1.11@3036,1026 3139,1026 3189,1076 U1.5@3256,1076
NetC5_1: C5.1 C9.2 C13.1 L3.2 | length 299.1
  Bottom Layer w6: C13.1@2580.64,723 C5.1@2879.75,723
NetC5_2: C5.2 U1.6 U1.10 | length 544.9
  Bottom Layer w6: C5.2@2883,813 2885,811 2942,811 2949,818 2949,958 2967,976 U1.10@3036,976 3148,976 3198,1026 U1.6@3256,1026
NetC6_1: C6.1 C10.2 C14.1 L4.2 | length 306.4
  Bottom Layer w6: C14.1@2578.92,1248.33 2579.71,1247.53 C6.1@2885,1247.53
NetC6_2: C6.2 U1.4 U1.12 | length 447.5
  Bottom Layer w6: C6.2@2885,1157 2889,1153 2930,1153 2944,1139 2944,1101 2969,1076 U1.12@3036,1076 3123,1076 3173,1126 U1.4@3256,1126
NetC11_2: C11.2 L5.1 | length 102.4
  Bottom Layer w6: L5.1@2473,1396 2474,1397 C11.2@2575,1397
NetC12_2: C12.2 L6.1 | length 99.6
  Bottom Layer w6: L6.1@2476.16,1047 2478.16,1049 C12.2@2574.9,1049
NetC13_2: C13.2 L7.1 | length 105.6
  Bottom Layer w6: L7.1@2476.16,810.29 2478.87,813 C13.2@2580.64,813
NetC14_2: C14.2 L8.1 | length 102.8
  Bottom Layer w6: L8.1@2476.25,1158 2476.58,1158.33 C14.2@2578.92,1158.33
NetC15_1: C15.1 C19.2 L5.2 L9.2 | length 303.3
  Bottom Layer w6: C19.2@2170.08,1487 2170.41,1487.33 C15.1@2271.56,1487.33 2271.88,1487 L9.2@2371.08,1487 L5.2@2473.08,1487
NetC16_1: C16.1 C20.2 L6.2 L10.2 | length 308
  Bottom Layer w6: C20.2@2170,961.33 2174.33,957 L6.2@2476.16,957
NetC17_2: C17.2 C21.2 L7.2 L11.2 | length 308.5
  Bottom Layer w6: C21.2@2169.64,725 2174.35,720.29 L7.2@2476.16,720.29
NetC18_2: C18.2 C22.2 L8.2 L12.2 | length 307.8
  Bottom Layer w6: C22.2@2170.08,1244 2174.08,1248 L8.2@2476.25,1248
NetC19_1: C19.1 U2.3 U2.13 | length 598.3
  Bottom Layer w6: U2.13@1796,1111 1883,1111 1933,1161 U2.3@2016,1161 2113,1161 2132.5,1180.5 2132.5,1315.5 2170.08,1353.08 C19.1@2170.08,1397 ; C19.1@2156.65,1396.33 C19.1@2157.32,1397
NetC20_1: C20.1 U2.5 U2.11 | length 398.9
  Bottom Layer w6: U2.11@1796,1011 1890,1011 1940,1061 U2.5@2016,1061 2101,1061 2111,1051 C20.1@2170,1051
NetC21_1: C21.1 U2.6 U2.10 | length 582.4
  Bottom Layer w6: U2.10@1796,961 1888.03,961 1938.03,1011 U2.6@2016,1011 2095.49,1011 2099,1007.49 2099,826 2108,817 C21.1@2171,817
NetC22_1: C22.1 U2.4 U2.12 | length 412.6
  Bottom Layer w6: U2.12@1796,1061 1885.8,1061 1935.8,1111 U2.4@2016,1111 2101,1111 2142.1,1152.1 2168.18,1152.1 C22.1@2170.08,1154